# EAGLE board DP_eDP_Adapter _v1.1 (EAGLE 6.4)
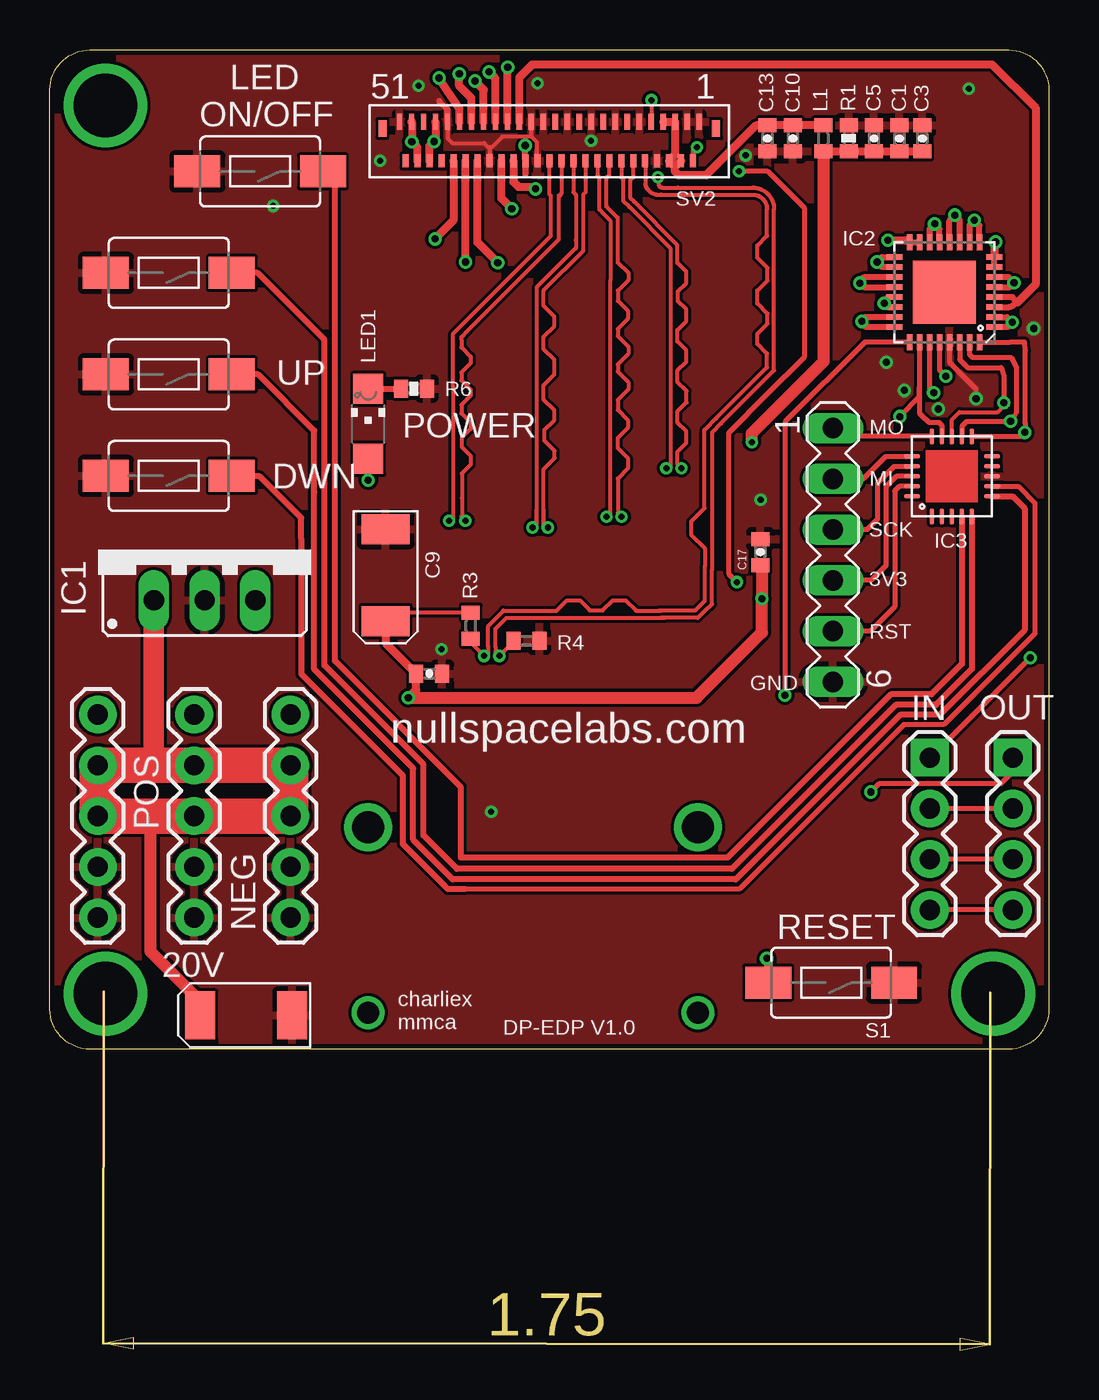
[diagram p0: board, top side]
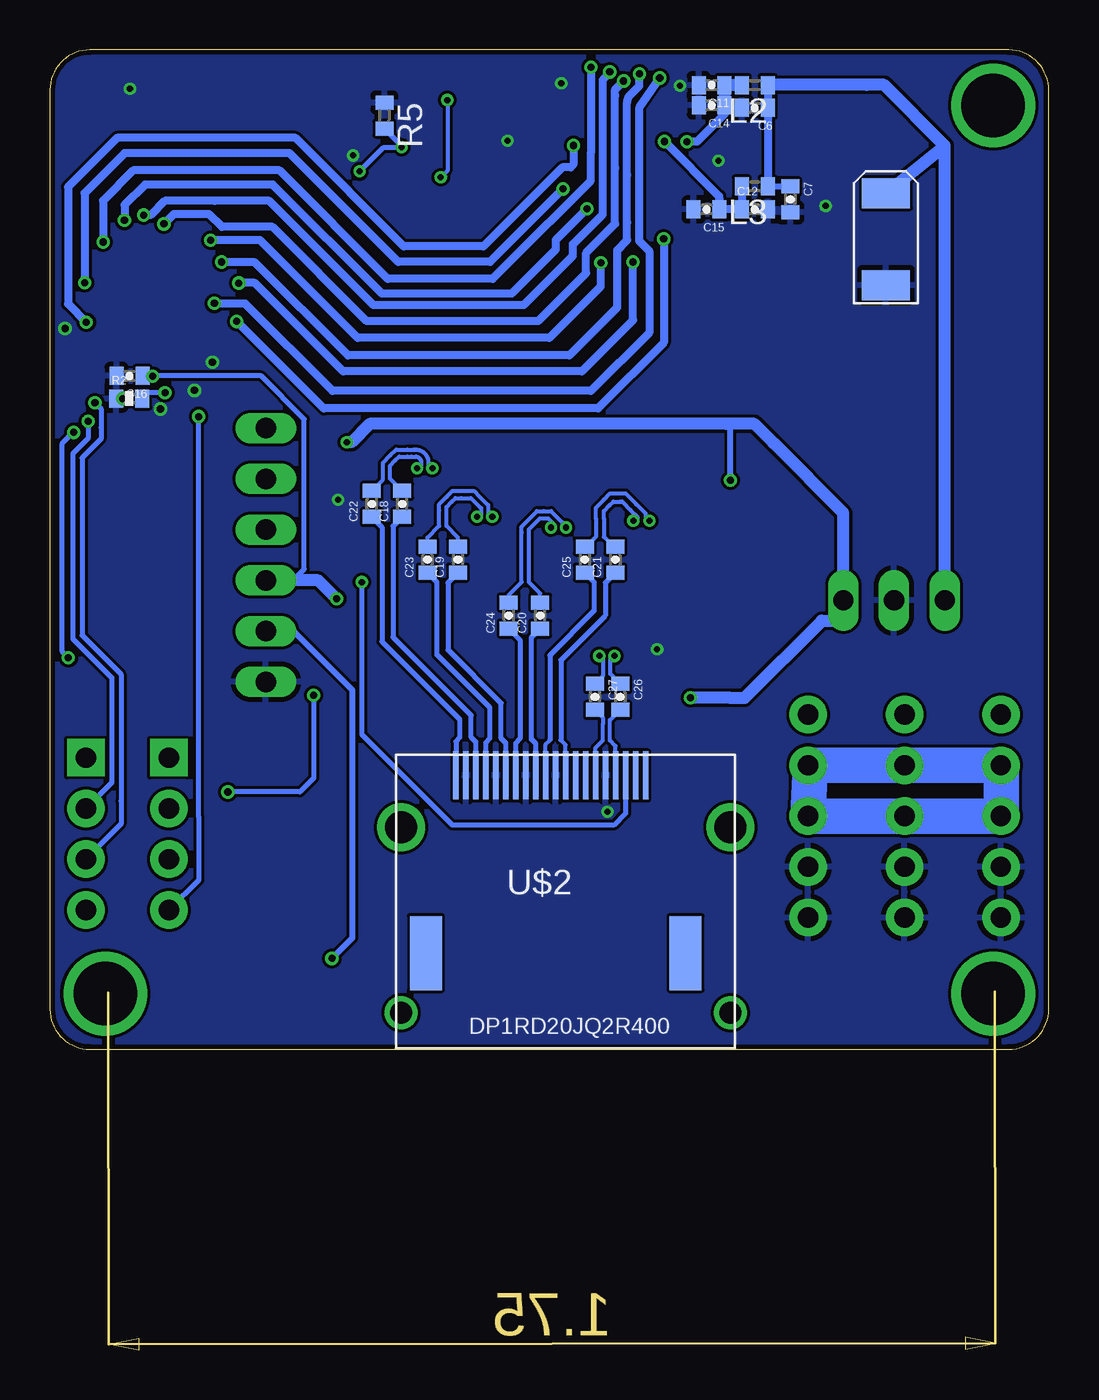
[diagram p1: board, bottom side, seen from below]

Size 50 x 50 mm. Coordinates in mm from the lower left corner, seen from the top.
Outline: 50,48 50,2 arc-90 48,0 2,0 arc-90 0,2 0,48 arc-90 2,50 48,50 arc-90 50,48
Copper layers (1*16): Top 0.035mm / dielectric 1.5mm / Bottom 0.035mm
Design rules "ITEADstudio_DRC": minimum track width 6mil, minimum drill 12mil, track to track 6mil, track to pad 6mil, pad to pad 6mil, via to via 6mil, smd to smd 0mil, copper to edge 10mil, drill to drill 10mil, minimum pad ring 10mil, minimum via ring 6mil, stop-mask expansion 2mil, vias tented up to drill 100mil, thermal gap 10mil
Net classes: 0 default: width 0.203 mm; 1 DP: width 0.203 mm, drill 0.305 mm, clearance 0.203 mm; 2 Power: width 0.305 mm

## Footprints (pad centres in the part's own frame; a part is rotated, then mirrored left to right if it is on the bottom)
0402-CAP = smd 0.7 x 0.9: 1 -0.65,0; 2 0.65,0
EIA6032 = smd 1.5 x 2.4: P$1 -2.3,0; P$2 2.3,0
SPARKFUN-PASSIVES_0402-CAP = smd 0.7 x 0.9: 1 -0.65,0; 2 0.65,0
78XXS = drill 1.016 long: GND 0,-2.54; IN -2.54,-2.54; OUT 2.54,-2.54
QFN32_XLP = smd 0.285 x 0.8: 1 -1.75,-2.5; 2 -1.25,-2.5; 3 -0.75,-2.5; 4 -0.25,-2.5; 5 0.25,-2.5; 6 0.75,-2.5; 7 1.25,-2.5; 8 1.75,-2.5; 17 1.75,2.5; 18 1.25,2.5; 19 0.75,2.5; 20 0.25,2.5; 21 -0.25,2.5; 22 -0.75,2.5; 23 -1.25,2.5; 24 -1.75,2.5 | smd 0.8 x 0.285: 9 2.5,-1.75; 10 2.5,-1.25; 11 2.5,-0.75; 12 2.5,-0.25; 13 2.5,0.25; 14 2.5,0.75; 15 2.5,1.25; 16 2.5,1.75; 25 -2.5,1.75; 26 -2.5,1.25; 27 -2.5,0.75; 28 -2.5,0.25; 29 -2.5,-0.25; 30 -2.5,-0.75; 31 -2.5,-1.25; 32 -2.5,-1.75 | smd 3.15 x 3.15: EP 0,0
MLF20 = smd 0.8 x 0.23: P$1 -2,1; P$2 -2,0.5; P$3 -2,0; P$4 -2,-0.5; P$5 -2,-1; P$11 2,-1; P$12 2,-0.5; P$13 2,0; P$14 2,0.5; P$15 2,1 | smd 0.23 x 0.8: P$6 -1,-2; P$7 -0.5,-2; P$8 0,-2; P$9 0.5,-2; P$10 1,-2; P$16 1,2; P$17 0.5,2; P$18 0,2; P$19 -0.5,2; P$20 -1,2
1X05 = drill 1.016 pad 1.88: 1 0,0; 2 2.54,0; 3 5.08,0; 4 7.62,0; 5 10.16,0
R0402 = smd 0.7 x 0.9: 1 -0.65,0; 2 0.65,0
LED_CHIPLED_1206 = smd 1.5 x 1.5: A 0,-1.75; C 0,1.75
0402-RES = smd 0.7 x 0.9: 1 -0.65,0; 2 0.65,0
TACTILE-SWITCH-1101NE = smd 2.3 x 1.6: P$1 -3.15,0; P$2 3.15,0
1X04 = drill 1.016 pad 1.88 square: 1 0,0 | drill 1.016 pad 1.88: 2 2.54,0; 3 5.08,0; 4 7.62,0
MA06-1 = drill 1.016 long: 1 -6.35,0; 2 -3.81,0; 3 -1.27,0; 4 1.27,0; 5 3.81,0; 6 6.35,0
EDP_MOLEX = smd 0.26 x 0.8: P$1 -7.5,-1.08; P$3 -6.9,-1.08; P$5 -6.3,-1.08; P$7 -5.7,-1.08; P$9 -5.1,-1.08; P$11 -4.5,-1.08; P$13 -3.9,-1.08; P$15 -3.3,-1.08; P$17 -2.7,-1.08; P$19 -2.1,-1.08; P$21 -1.5,-1.08; P$23 -0.9,-1.08; P$25 -0.3,-1.08; P$27 0.3,-1.08; P$29 0.9,-1.08; P$31 1.5,-1.08; P$33 2.1,-1.08; P$35 2.7,-1.08; P$37 3.3,-1.08; P$39 3.9,-1.08; P$41 4.5,-1.08; P$43 5.1,-1.08; P$45 5.7,-1.08; P$47 6.3,-1.08; P$49 6.9,-1.08; P$51 7.5,-1.08 | smd 0.3 x 0.65: P$2 -7.2,0.87; P$4 -6.6,0.87; P$6 -6,0.87; P$8 -5.4,0.87; P$10 -4.8,0.87; P$12 -4.2,0.87; P$14 -3.6,0.87; P$16 -3,0.87; P$18 -2.4,0.87; P$20 -1.8,0.87; P$22 -1.2,0.87; P$24 -0.6,0.87; P$26 0,0.87; P$28 0.6,0.87; P$30 1.2,0.87; P$32 1.8,0.87; P$34 2.4,0.87; P$36 3,0.87; P$38 3.6,0.87; P$40 4.2,0.87; P$42 4.8,0.87; P$44 5.4,0.87; P$46 6,0.87; P$48 6.6,0.87; P$50 7.2,0.87 | smd 0.4 x 0.85: P$52 8.35,-0.75; P$53 -8.35,-0.75
DP_REVERSE_JAE = smd 0.28 x 2.4: P$1 -5.5,0; P$2 -5,0; P$3 -4.5,0; P$4 -4,0; P$5 -3.5,0; P$6 -3,0; P$7 -2.5,0; P$8 -2,0; P$9 -1.5,0; P$10 -1,0; P$11 -0.5,0; P$12 0,0; P$13 0.5,0; P$14 1,0; P$15 1.5,0; P$16 2,0; P$17 2.5,0; P$18 3,0; P$19 3.5,0; P$20 4,0 | drill 1.6: P$22 8.25,-2.6; P$23 -8.25,-2.6 | smd 1.6 x 3.7: P$24 -7,-8.89; P$25 6,-8.89 | drill 1.1: P$26 -8.25,-11.88; P$27 8.25,-11.88

## Placement (x,y rotation side)
C1  .1uf  [0402-CAP]  42.53,45.57 90 top
C2  10uF 50V  [EIA6032]  9.82,1.69 0 top
C3  0.1uF  [0402-CAP]  43.67,45.57 90 top
C4  100uF 50V  [EIA6032]  8.15,40.53 270 bottom
C5  82pF  [0402-CAP]  41.26,45.57 90 top
C6  820pF 50V  [0402-CAP]  14.71,47.1 180 bottom
C7  820pF 50V  [0402-CAP]  12.94,42.53 270 bottom
C8  10uF  [EIA6032]  16.81,23.72 90 top
C9  .1uf  [0402-CAP]  18.99,18.79 0 top
C10  82pF  [0402-CAP]  37.19,45.57 270 top
C11  100pF 50V  [0402-CAP]  16.87,48.24 180 bottom
C12  100pF 50V  [0402-CAP]  14.71,42.02 0 bottom
C13  1000pF  [0402-CAP]  35.92,45.57 270 top
C14  820pF 50V  [0402-CAP]  16.87,47.23 180 bottom
C15  820pF 50V  [0402-CAP]  17.13,42.02 180 bottom
C16  0.1uF  [0402-CAP]  46.02,33.69 180 bottom
C17  0.1uF  [0402-CAP]  35.57,24.87 90 top
C18  [SPARKFUN-PASSIVES_0402-CAP]  32.37,27.29 90 bottom
C19  [SPARKFUN-PASSIVES_0402-CAP]  29.57,24.49 90 bottom
C20  [SPARKFUN-PASSIVES_0402-CAP]  25.46,21.7 90 bottom
C21  [SPARKFUN-PASSIVES_0402-CAP]  21.7,24.49 90 bottom
C22  [SPARKFUN-PASSIVES_0402-CAP]  33.89,27.29 90 bottom
C23  [SPARKFUN-PASSIVES_0402-CAP]  31.1,24.49 90 bottom
C24  [SPARKFUN-PASSIVES_0402-CAP]  27.03,21.7 90 bottom
C25  [SPARKFUN-PASSIVES_0402-CAP]  23.22,24.49 90 bottom
C26  [SPARKFUN-PASSIVES_0402-CAP]  21.44,17.63 270 bottom
C27  [SPARKFUN-PASSIVES_0402-CAP]  22.71,17.63 270 bottom
IC1  [78XXS]  7.74,25 0 top
IC2  TLC5947XLP  [QFN32_XLP]  44.78,37.89 90 top
IC3  tiny2313  [MLF20]  45.15,28.66 90 top
JP1  [1X05]  2.39,16.74 270 top
JP2  [1X05]  7.22,16.74 270 top
JP3  [1X05]  12.05,16.74 270 top
L1  240ohm-300ma  [R0402]  38.72,45.57 90 top
L2  240ohm-300ma  [R0402]  14.71,48.24 180 bottom
L3  240ohm-300ma  [R0402]  14.71,43.17 180 bottom
LED1  [LED_CHIPLED_1206]  15.93,31.29 0 top
R1  [0402-RES]  39.99,45.57 270 top
R2  [0402-RES]  46.02,32.56 0 bottom
R3  100K  [R0402]  21.06,21.19 90 top
R4  100K  [R0402]  23.86,20.43 180 top
R5  100K  [R0402]  33.26,46.72 270 bottom
R6  [0402-RES]  18.22,33.05 180 top
S1  SWITCH-MOMENTARY-2-SMD-1101NE  [TACTILE-SWITCH-1101NE]  39.11,3.33 180 top
S2  SWITCH-MOMENTARY-2-SMD-1101NE  [TACTILE-SWITCH-1101NE]  5.95,28.68 180 top
S3  SWITCH-MOMENTARY-2-SMD-1101NE  [TACTILE-SWITCH-1101NE]  5.95,33.76 180 top
S4  SWITCH-MOMENTARY-2-SMD-1101NE  [TACTILE-SWITCH-1101NE]  5.95,38.84 180 top
S5  SWITCH-MOMENTARY-2-SMD-1101NE  [TACTILE-SWITCH-1101NE]  10.52,43.92 180 top
SIG_IN  [1X04]  44.05,14.59 270 top
SIG_OUT  [1X04]  48.2,14.59 270 top
SV1  [MA06-1]  39.2,24.73 270 top
SV2  EDP_CONNECTOR  [EDP_MOLEX]  25,45.32 180 top
U$2  DP1RD20JQ2R400  [DP_REVERSE_JAE]  24.18,13.7 0 bottom

## Library data of the parts
C1-C15 R1 R2 R6 = SparkFun-Passives
C16 C17 = SparkFun
C18-C27 SV2 U$2 = DP_eDP_Adapter
IC1 = v-reg
IC2 = slice_noshift
IC3 = NSL_Cylon
JP1-JP3 SIG_IN SIG_OUT = SparkFun-Connectors
L1-L3 R3-R5 = rcl
LED1 = badge.lbrbadge_2013
S1-S5 = SparkFun-Electromechanical
SV1 = NSL

## Nets
20V [Power]: C2.P$1 C4.P$1 C6.1 C7.1 IC1.IN JP1.2 JP1.3 JP2.2 JP2.3 JP3.2 JP3.3 L2.1 L3.1
+3V3: C1.1 C3.1 C5.1 C8.P$1 C9.1 C16.1 C17.1 IC1.OUT IC2.28 IC3.P$18 L1.1 LED1.A R1.2 R3.2 SV1.4
AUX_CH_N: C26.1 R3.1 SV2.P$10
AUX_CH_P: C27.1 R4.2 SV2.P$9
AUX_N: C26.2 U$2.P$17
AUX_P: C27.2 U$2.P$15
BLANK: IC2.30 IC3.P$13 SIG_IN.3 SIG_OUT.3
BUTTON_1: IC3.P$7 S2.P$1
BUTTON_2: IC3.P$6 S3.P$1
BUTTON_3: IC3.P$5 S4.P$1
BUTTON_4: IC3.P$4 S5.P$1
GND: C1.2 C2.P$2 C3.2 C4.P$2 C5.2 C6.2 C7.2 C8.P$2 C9.2 C10.2 C11.2 C12.2 C13.2 C14.2 C15.2 C16.2 C17.2 IC1.GND IC2.29 IC3.P$8 JP1.4 JP1.5 JP2.4 JP2.5 JP3.4 JP3.5 R1.1 R2.1 R4.1 R5.1 R6.1 S1.P$1 S2.P$2 S3.P$2 S4.P$2 S5.P$2 SV1.6 SV2.P$1 SV2.P$3 SV2.P$8 SV2.P$11 SV2.P$15 SV2.P$19 SV2.P$23 SV2.P$27 SV2.P$28 SV2.P$29 SV2.P$36 SV2.P$43 SV2.P$51 U$2.P$2 U$2.P$5 U$2.P$8 U$2.P$11 U$2.P$16
HPD: R5.2 SV2.P$2 U$2.P$18
LANE0_N: C18.2 SV2.P$12
LANE0_P: C22.2 SV2.P$14
LANE1_N: C19.2 SV2.P$16
LANE1_P: C23.2 SV2.P$18
LANE2_N: C20.2 SV2.P$20
LANE2_P: C24.2 SV2.P$22
LANE3_N [DP]: C21.2 SV2.P$24
LANE3_P [DP]: C25.2 SV2.P$26
LED_NEG_1A: IC2.23 IC2.24 SV2.P$42
LED_NEG_1B: IC2.11 IC2.12 SV2.P$35
LED_NEG_2A: IC2.21 IC2.22 SV2.P$41
LED_NEG_2B: IC2.9 IC2.10 SV2.P$34
LED_NEG_3A: IC2.19 IC2.20 SV2.P$40
LED_NEG_3B: IC2.7 IC2.8 SV2.P$33
LED_NEG_4A: IC2.17 IC2.18 SV2.P$39
LED_NEG_4B: IC2.5 IC2.6 SV2.P$32
LED_NEG_5A: IC2.15 IC2.16 SV2.P$38
LED_NEG_5B: IC2.3 IC2.4 SV2.P$31
LED_NEG_6A: IC2.13 IC2.14 SV2.P$37
LED_NEG_6B: IC2.1 IC2.2 SV2.P$30
LED_POS_1: C11.1 C14.1 L2.2 SV2.P$48 SV2.P$49
LED_POS_2: C12.1 C15.1 L3.2 SV2.P$45 SV2.P$46
MISO: IC3.P$16 SV1.2
MOSI: IC3.P$15 SV1.1
N$3: LED1.C R6.2
N$3_N [DP]: C18.1 U$2.P$3
N$3_P [DP]: C22.1 U$2.P$1
N$5: IC3.P$10
N$13: IC2.27 R2.2
N$15_N [DP]: C19.1 U$2.P$6
N$15_P [DP]: C23.1 U$2.P$4
N$17_N [DP]: C20.1 U$2.P$9
N$17_P [DP]: C24.1 U$2.P$7
N$19_N [DP]: C21.1 U$2.P$12
N$19_P [DP]: C25.1 U$2.P$10
RST: IC3.P$19 S1.P$2 SV1.5
SCK: IC3.P$17 SV1.3
SCLK: IC2.31 IC3.P$12 SIG_IN.2 SIG_OUT.2
SIN: IC2.32 IC3.P$11 SIG_IN.1
SOUT: IC2.25 SIG_OUT.1
VIN: C10.1 C13.1 L1.2 SV2.P$4 SV2.P$5 SV2.P$6 SV2.P$7
XLAT: IC2.26 IC3.P$14 SIG_IN.4 SIG_OUT.4

## Tracks (layer width: path | path; a pad name or v marks a point on that pad's centre or on a via)
20V
  Top 0.203: 2.37,11.69 JP1.3
  Top 0.61: 5.2,14.22 5.12,14.22 4.43,14.22 4.43,14.21 7.8,14.21 | 5.04,11.66 5.04,4.89 7.52,2.4 C2.P$1
  Top 1.016: IC1.IN 5.2,14.29 5.12,14.22
  Top 1.778: JP1.2 JP2.2 7.8,14.21 JP3.2 JP3.3 JP2.3 5.04,11.66 JP1.3 | 2.37,14.18 2.37,11.69
  Bottom 0.305: L3.1 C7.1
  Bottom 0.406: L2.1 C6.1 L3.1
  Bottom 0.61: 14.05,48.26 L2.1 14.06,48.25 9.12,48.25 8.24,48.25 5.2,45.22 | IC1.IN 5.2,45.22 | 5.2,45.22 C4.P$1
  Bottom 1.778: 2.36,14.22 11.93,14.22 11.93,14.18 11.92,14.18 JP3.3 JP1.3 2.38,14.14
+3V3  (via drill 0.3, 0.36)
  Top 0.203: R3.2 17.23,21.84 C8.P$1
  Top 0.254: IC2.28 44.53,33.99 v44.85,33.67 | IC3.P$18 43.14,28.66 42.37,28.66 41.85,28.14 41.85,24.2 41.11,23.46 SV1.4
  Top 0.305: 23.25,17.54 23.3,17.58 | LED1.A v15.93,28.47
  Top 0.406: L1.1 R1.2 C5.1 C1.1 C3.1 | C8.P$1 16.81,20.32 C9.1 18.34,17.98 18.14,17.78 v17.94,17.58
  Top 0.61: v17.94,17.58 23.3,17.58 32.37,17.58 35.64,20.86 v35.64,22.54 35.64,24.15 C17.1 | v35.13,30.37 35.13,30.82 38.42,34.11 | 38.42,34.11 38.73,34.41 | L1.1 38.73,34.41 | 38.73,34.41 38.42,34.11
  Bottom 0.254: C16.1 45.35,33.67 v44.85,33.67 44.84,33.69 39.43,33.69 37.27,31.53 37.27,24.02 37.76,23.53 SV1.4
  Bottom 0.305: v15.93,28.47 15.93,31.07 16.15,31.29
  Bottom 0.61: v35.64,22.54 36.56,23.46 SV1.4 | v17.94,17.58 15.95,17.58 15.22,17.58 11.36,21.44 10.31,21.44 IC1.OUT 10.28,26.83 13.79,30.33 14.74,31.29 16.15,31.29 33.99,31.29 34.91,30.37 v35.13,30.37
AUX_CH_N  (via drill 0.3)
  Top 0.203: 21.94,19.68 v21.74,19.68 | SV2.P$10 29.8,43.3 arc90 30.64,42.75 31.29,42.75 35.19,42.75 arc-90 35.9,42.04 35.9,40.7 35.41,40.22 35.41,39.61 35.92,39.1 35.92,38.46 35.41,37.95 35.41,37.32 35.92,36.81 35.92,36.3 35.41,35.8 35.41,35.29 35.9,34.8 35.9,34.12 33.34,31.57 32.78,31 32.77,30.99 32.77,27.07 32.1,26.4 32.1,25.75 32.78,25.06 32.78,24.16 32.78,22.43 32.49,22.14 32.29,21.94 30.56,21.94 | R3.1 21.06,20.35 v21.74,19.68 | v21.74,19.68 arc90 21.94,19.88 21.94,20.15 21.94,21.18 22.33,21.57 22.7,21.94 25.37,21.94 25.89,22.46 26.52,22.46 27.03,21.95 27.67,21.95 28.18,22.46 28.82,22.46 29.33,21.95 29.34,21.94 30.51,21.94 | 30.51,21.94 30.56,21.94 | 30.56,21.94 30.6,21.94 | 30.56,21.94 30.51,21.94
  Bottom 0.203: C26.1 21.94,18.78 21.94,19.68 v21.74,19.68
AUX_CH_P  (via drill 0.3)
  Top 0.203: 22.3,19.68 v22.5,19.68 | v30.44,43.63 arc-90 30.49,43.49 30.49,43.26 arc90 30.64,43.11 31.44,43.11 35.19,43.11 arc-90 36.25,42.04 36.25,33.97 33.6,31.31 33.14,30.86 33.14,24.01 33.14,22.29 arc-90 33.13,22.27 32.75,21.89 32.44,21.58 30.56,21.58 | v30.11,47.49 SV2.P$9 | R4.2 23.33,20.52 v22.5,19.68 | v22.5,19.68 arc-90 22.3,19.88 22.3,20.15 22.3,21.03 22.59,21.32 22.85,21.58 30.51,21.58 | 30.51,21.58 30.56,21.58 | 30.56,21.58 30.75,21.58 | 30.51,21.58 30.56,21.58
  Bottom 0.203: C27.1 22.3,18.7 22.3,19.68 v22.5,19.68 | v30.11,47.49 30.11,43.96 v30.44,43.63
AUX_N
  Bottom 0.203: U$2.P$17 21.68,15.16 21.96,15.45 21.96,16.26 21.96,16.46 C26.2
AUX_P
  Bottom 0.203: U$2.P$15 22.68,15.09 22.32,15.45 22.32,16.26 22.32,16.59 C27.2
BLANK  (via drill 0.36)
  Top 0.203: IC3.P$13 45.15,31.5 45.54,31.88 47.44,31.88 47.75,32.19 v47.75,32.34
  Top 0.254: IC2.30 45.55,35.37 45.55,34.5 45.94,34.11 47.62,34.11 47.76,33.7 47.76,32.35 v47.75,32.34 | SIG_OUT.3 SIG_IN.3
  Bottom 0.254: v47.75,32.34 47.44,32.04 47.44,31.11 47.44,30.54 48.39,29.59 48.39,20.71 46.44,18.75 46.44,12.43 46.44,11.27 SIG_OUT.3
BUTTON_1
  Top 0.254: IC3.P$7 48.47,28.16 49.31,27.32 49.31,20.8 44.75,16.24 42.74,16.24 34.51,8.01 20.76,8.01
  Top 0.305: 20.76,8.01 19.92,8.01 17.67,10.26 17.67,13.68 13.18,18.17 12.58,18.78 12.58,25.53 12.58,26.59 10.51,28.66 9.12,28.66 S2.P$1
BUTTON_2
  Top 0.305: IC3.P$6 48.19,27.66 48.8,27.06 48.8,20.97 44.56,16.73 42.56,16.73 34.34,8.5 20.16,8.5 18.18,10.48 18.18,14.05 13.23,19.01 13.23,27.87 13.23,30.96 10.42,33.76 S3.P$1
BUTTON_3
  Top 0.305: IC3.P$5 46.15,19.02 44.36,17.23 42.34,17.23 34.13,9.02 20.38,9.02 18.7,10.7 18.7,14.26 13.75,19.21 13.75,27.68 13.75,35.49 10.39,38.84 S4.P$1
BUTTON_4
  Top 0.305: IC3.P$4 45.65,19.27 44.13,17.75 42.09,17.75 33.93,9.58 20.58,9.58 20.58,13.11 14.27,19.43 14.27,27.45 14.27,43.33 S5.P$1
GND  (via drill 0.3, 0.36)
  Top 0.203: SV2.P$43 19.91,45.57 20.15,45.33 21.74,45.33 21.93,45.14 | 21.93,45.14 22,45.07 SV2.P$36 | SV2.P$28 24.38,44.47 24.38,45.38 24.1,45.66 | 24.1,45.66 SV2.P$29 | 24.1,45.66 22.65,45.66 22.12,45.14 21.93,45.14
  Top 0.254: IC2.29 45.03,34.38 45.16,34.26 46.36,33.05 v46.36,32.56
  Top 0.305: SV2.P$43 19.9,47.03 19.49,47.44
  other vias: 44.47,32.04 42.77,32.96 41.87,34.37 49.24,36.06 11.17,42.2 45.99,48.06 22.09,11.88 19.6,20.01 34.83,44.72 35.58,27.49 16.53,44.46 27.1,45.46 18.46,48.22 24.4,48.33
  pour Top: -0.91,50.91 51.42,50.91 51.42,-0.91 -0.91,-0.91
  pour Bottom: 53.19,53.45 53.19,-1.92 -1.42,-1.92 -1.42,53.45
HPD  (via drill 0.3)
  Top 0.254: v34.38,23.37 33.99,23.77 33.99,30.86 35.9,32.76 37.79,34.65 37.79,42.07 35.94,43.92 v34.5,43.92 34.78,43.92 | v32.39,45.13 32.2,44.94 SV2.P$2
  Bottom 0.254: U$2.P$18 21.18,11.8 21.77,11.21 29.85,11.21 34.38,15.74 v34.38,23.37 | v34.5,43.92 33.29,45.13 v32.39,45.13 32.39,45.2 R5.2
LANE0_N  (via drill 0.3)
  Top 0.203: 31.41,29.06 v31.62,29.06 arc-90 31.43,29.25 31.43,29.9 31.86,30.33 31.86,30.92 31.43,31.35 31.43,31.92 31.87,32.37 31.87,32.94 31.43,33.38 31.43,33.97 31.86,34.4 31.86,34.97 31.41,35.41 31.41,35.99 31.86,36.43 31.86,37.01 31.43,37.45 31.43,37.9 31.86,38.34 31.86,38.91 31.41,39.35 31.41,40.24 29.25,42.4 29.06,42.59 29.06,43.5 29.2,43.64 SV2.P$12
  Bottom 0.203: C18.2 32.98,28.55 32.98,28.73 32.98,29.01 32.98,29.19 32.71,29.46 32.52,29.65 32.1,29.65 31.92,29.65 31.69,29.65 arc90 31.41,29.37 31.41,29.27 arc90 v31.62,29.06
LANE0_P  (via drill 0.3)
  Top 0.203: v30.86,29.06 31.06,29.06 31.06,40.09 29,42.15 28.71,42.44 28.71,43.5 28.6,43.61 SV2.P$14
  Bottom 0.203: C22.2 33.33,28.5 33.33,28.73 33.33,29.01 33.33,29.34 32.96,29.71 32.67,30 32.1,30 31.77,30 31.69,30 arc90 31.06,29.37 31.06,29.27 arc-90 v30.86,29.06
LANE1_N  (via drill 0.3)
  Top 0.203: 28.42,26.64 v28.62,26.64 | SV2.P$16 28,43.76 27.86,43.62 27.86,42.17 28.01,42.02 28.42,41.61 28.42,40.11 28.42,40 28.42,39.38 28.95,38.84 28.95,38.48 28.43,37.95 28.43,37.45 28.94,36.94 28.94,36.56 28.43,36.05 28.43,35.68 28.95,35.16 28.95,34.79 28.43,34.27 28.43,33.9 28.95,33.38 28.95,33.01 28.43,32.49 28.43,31.98 28.94,31.48 28.94,31.1 28.43,30.59 28.43,30.08 28.94,29.57 28.94,29.06 28.43,28.56 28.43,26.83 v28.62,26.64 | 28.42,26.84 v28.62,26.64
  Bottom 0.203: C19.2 29.57,25.6 30.16,26.18 30.16,26.96 30.16,27.12 29.89,27.39 29.7,27.58 29.41,27.58 28.92,27.58 28.75,27.4 28.42,27.07 28.42,26.64 v28.62,26.64
LANE1_P  (via drill 0.3)
  Top 0.203: 28.06,26.64 v27.86,26.64 28.05,26.83 28.05,27.49 | SV2.P$18 27.4,43.72 27.5,43.62 27.5,42.02 27.76,41.77 28.06,41.46 28.06,38.48 28.06,27.5 28.05,27.49 | 28.05,28.05 28.05,27.49
  Bottom 0.203: C23.2 31.1,25.6 30.51,26.18 30.51,26.96 30.51,27.27 30.14,27.64 29.85,27.93 29.41,27.93 28.77,27.93 28.49,27.65 28.06,27.22 28.06,26.64 v27.86,26.64
LANE2_N  (via drill 0.3)
  Top 0.203: 24.72,26.98 24.72,26.11 v24.92,26.11 24.72,26.31 24.72,26.98 | SV2.P$20 26.8,42.87 26.69,42.75 26.69,40.48 26.69,39.94 24.72,37.97 24.72,37.19 25.25,36.66 25.25,36.18 24.72,35.64 24.72,35.03 25.25,34.5 25.25,33.76 24.72,33.23 24.72,32.51 25.25,31.97 25.25,31.48 24.75,30.97 24.75,30.46 25.27,29.94 25.27,29.57 24.72,29.03 24.72,26.98
  Bottom 0.203: C20.2 25.46,22.8 26.03,23.37 26.03,25.86 26.03,26.01 25.7,26.34 25.47,26.56 25.27,26.56 25.06,26.56 24.88,26.39 24.72,26.22 24.72,26.11 v24.92,26.11
LANE2_P  (via drill 0.3)
  Top 0.203: 24.36,26.98 24.36,26.11 v24.16,26.11 24.36,26.31 24.36,26.98 | 24.36,26.98 24.36,38.12 26.32,40.07 26.33,40.09 26.33,40.48 26.33,42.75 26.2,42.89 SV2.P$22
  Bottom 0.203: C24.2 27.03,22.73 26.38,23.37 26.38,25.86 26.38,26.15 25.95,26.59 25.62,26.92 25.27,26.92 24.91,26.92 24.63,26.64 24.36,26.37 24.36,26.11 v24.16,26.11
LANE3_N  (via drill 0.3)
  Top 0.203: SV2.P$24 25.6,42.83 arc-90 25.48,42.72 25.48,40.52 20.93,35.97 20.59,35.63 20.59,35.53 20.59,35.12 21.06,34.65 21.06,34.34 20.59,33.87 20.59,33.47 21.06,33 21.06,32.71 20.59,32.24 20.59,31.82 21.06,31.35 21.06,31.05 20.61,30.59 20.61,30.14 21.06,29.69 21.06,29.25 20.62,28.81 20.62,27.58 20.62,26.63 v20.8,26.45 | 20.62,26.45 v20.8,26.45 | 20.68,26.56 v20.8,26.45 | 20.59,26.65 v20.8,26.45
  Bottom 0.203: C21.2 21.78,25.14 22.27,25.64 22.27,26.56 22.27,26.92 21.99,27.21 21.79,27.4 21.46,27.4 21.35,27.4 20.93,26.98 20.59,26.64 20.59,26.45 v20.8,26.45
LANE3_P  (via drill 0.3)
  Top 0.203: v19.98,26.45 20.19,26.45 20.19,32.56 20.19,33.11 20.19,35.8 20.64,36.26 25.08,40.69 25.08,42.72 25,42.79 SV2.P$26
  Bottom 0.203: C25.2 23.17,25.14 22.68,25.64 22.68,26.56 22.68,27.09 22.27,27.49 21.96,27.81 21.46,27.81 21.18,27.81 20.64,27.27 20.19,26.81 20.19,26.45 v19.98,26.45
LED_NEG_1A  (via drill 0.36)
  Top 0.254: SV2.P$42 20.23,44.45
  Top 0.305: IC2.23 40.86,36.63 arc90 v40.65,36.42 arc90 40.93,36.13 IC2.24
  Top 0.406: SV2.P$42 20.2,41.47 v19.27,40.55
  Bottom 0.406: v40.65,36.42 36.29,32.06 22.56,32.06 19.27,35.35 v19.27,40.55
LED_NEG_1B  (via drill 0.36)
  Top 0.305: IC2.11 45.53,41.51 v45.31,41.74 45.03,41.47 IC2.12
  Top 0.406: SV2.P$35 22.3,48.58 v21.98,48.9
  Bottom 0.406: v45.31,41.74 44.96,41.74 44.25,42.45 41.75,42.45 39.02,42.45 33.8,37.23 26.28,37.23 25.72,37.79 23.82,39.69 23.82,40.28 22.32,41.78 22.32,44.36 22.32,48.51 21.98,48.85 v21.98,48.9
LED_NEG_2A  (via drill 0.36)
  Top 0.305: IC2.22 41.95,37.13 v41.76,37.32 arc-90 42.08,37.63 IC2.21
  Top 0.406: SV2.P$41 20.5,47.05 v19.48,48.6
  Bottom 0.406: v41.76,37.32 41.75,37.31 40.23,37.31 35.86,32.94 22.92,32.94 20,35.86 20,39.94 20.5,40.44 20.5,43.41 20.5,47.1 v19.48,48.6
LED_NEG_2B  (via drill 0.36)
  Top 0.305: IC2.10 46.03,41.23 v46.27,41.47 46.53,41.21 IC2.9
  Top 0.406: v23.12,42.06 22.6,42.58 SV2.P$34
  Bottom 0.406: v46.27,41.47 46.26,41.48 46.26,42.25 45.24,43.26 38.84,43.26 33.38,37.8 26.89,37.8 26.33,38.36 24.67,40.02 24.67,40.49 23.12,42.04 v23.12,42.06
LED_NEG_3A  (via drill 0.36)
  Top 0.305: IC2.20 40.74,38.13 v40.55,38.34 arc-90 40.84,38.63 IC2.19
  Top 0.406: v20.81,39.39 v20.8,39.4 SV2.P$40
  Bottom 0.406: v40.55,38.34 v40.53,38.35 39.74,38.35 35.31,33.91 23.37,33.91 20.81,36.48 v20.81,39.39
LED_NEG_3B  (via drill 0.36)
  Top 0.305: IC2.7 IC2.8
  Top 0.406: SV2.P$33 22.9,49.11 v22.92,49.13 | v47.34,40.39 47.28,40.34 IC2.8
  Bottom 0.406: v22.92,49.13 22.92,44.85 22.92,43.47 27.08,39.3 27.83,38.55 33.09,38.55 38.51,43.97 45.83,43.97 47.34,42.46 v47.34,40.39
LED_NEG_4A  (via drill 0.36)
  Top 0.305: IC2.17 41.65,39.63 v41.41,39.39 41.66,39.13 IC2.18
  Top 0.406: SV2.P$39 21.1,47.59 20.49,48.2 v20.49,48.8
  Bottom 0.406: v41.41,39.39 41.4,39.38 39.74,39.38 35.08,34.72 24,34.72 23.37,35.34 21.6,37.12 21.6,39.99 21.1,40.48 21.1,41.37 21.1,43.75 21.1,47.39 arc43 20.97,47.73 20.49,48.2 v20.49,48.8
LED_NEG_4B  (via drill 0.36)
  Top 0.305: IC2.6 47.98,38.63 v48.27,38.35 48.05,38.13 IC2.5
  Top 0.406: SV2.P$32 23.2,43.4 23.45,43.15 24.21,43.15 v24.31,43.05
  Bottom 0.406: v24.31,43.05 27.96,39.4 32.57,39.4 38.01,44.84 46.26,44.84 48.27,42.83 v48.27,38.35
LED_NEG_5A  (via drill 0.36)
  Top 0.305: IC2.16 IC2.15
  Top 0.406: v41.95,40.48 42.94,40.48 IC2.16 | v22.42,39.35 21.4,40.37 SV2.P$38
  Bottom 0.406: 41.93,40.46 v41.95,40.48 39.48,40.48 34.59,35.59 25,35.59 24.2,36.39 22.42,38.17 v22.42,39.35
LED_NEG_5B
  Top 0.305: 48.44,37.37 48.34,37.48 | 48.34,37.48 48.18,37.63 IC2.4 | IC2.3 47.99,37.13 arc90 48.34,37.48
  Top 0.406: SV2.P$31 23.5,48.63 24.15,49.28 47.16,49.28 49.35,47.1 49.35,38.27 48.44,37.37
LED_NEG_6A  (via drill 0.36)
  Top 0.305: IC2.14 44.03,41.04 v44.29,41.29 44.53,41.05 IC2.13
  Top 0.406: SV2.P$37 21.7,47.96 21.71,47.97 21.71,48.01 v21.28,48.44
  Bottom 0.406: v44.29,41.29 43.8,41.79 42.03,41.79 41.38,41.14 38.86,41.14 34.14,36.43 25.56,36.43 25.02,36.96 23.16,38.83 23.16,39.85 21.71,41.29 21.71,44.09 21.71,47.73 21.71,48.01 v21.28,48.44
LED_NEG_6B  (via drill 0.36)
  Top 0.305: SV2.P$30 23.8,43.78 v23.79,45.22 | IC2.1 47.93,36.13 v48.18,36.38 47.92,36.63 IC2.2
  Bottom 0.406: v23.79,45.22 23.79,44.27 23.93,44.13 24.35,44.13 28.3,40.18 32.29,40.18 37.71,45.6 46.64,45.6 49.09,43.15 49.09,37.29 v48.18,36.38
LED_POS_1  (via drill 0.36)
  Top 0.406: SV2.P$49 18.12,46.38 v18.12,45.41 18.4,45.12 SV2.P$48
  Bottom 0.406: C14.1 16.22,46.8 17.61,45.41 v18.12,45.41
  Bottom 0.61: L2.2 C11.1 C14.1
LED_POS_2  (via drill 0.36)
  Top 0.406: SV2.P$46 19,45.19 v19.23,45.42 arc90 19.3,45.49 SV2.P$45
  Bottom 0.406: L3.2 C12.1 C15.1 16.48,42.54 16.5,42.56 16.5,42.69 v19.23,45.42
MISO
  Top 0.254: IC3.P$16 43.12,29.64 41.81,29.64 40.72,28.54 SV1.2
MOSI
  Top 0.254: IC3.P$15 39.61,30.66 SV1.1
N$1  (via drill 3.17)
  other vias: 47.23,2.77
N$3
  Top 0.305: LED1.C 17.55,33.04 R6.2
N$3_N
  Bottom 0.254: U$2.P$3 28.68,15.37 28.91,15.6 28.91,16.71 32.82,20.62 32.82,26.18 C18.1
N$3_P
  Bottom 0.254: U$2.P$1 29.68,15.39 29.47,15.6 29.47,16.48 33.38,20.39 33.38,26.13 C22.1
N$4  (via drill 3.17)
  other vias: 2.77,47.23
N$6  (via drill 3.17)
  other vias: 2.77,2.77
N$13  (via drill 0.36)
  Top 0.254: IC2.27 44.03,33.05 v44.24,32.85
  Bottom 0.254: v44.24,32.85 45.08,32.85 R2.2
N$15_N
  Bottom 0.254: U$2.P$6 27.18,15.32 27.41,15.55 27.41,17.32 30.08,19.98 30.08,23.33 C19.1
N$15_P
  Bottom 0.254: U$2.P$4 28.18,15.34 27.97,15.55 27.97,17.09 30.64,19.75 30.64,23.39 C23.1
N$17_N
  Bottom 0.254: U$2.P$9 25.68,15.29 25.91,15.53 25.91,20.59 C20.1
N$17_P
  Bottom 0.254: U$2.P$7 26.68,15.32 26.47,15.53 26.47,20.49 C24.1
N$19_N
  Bottom 0.203: U$2.P$12 24.18,15.23 24.42,15.46
  Bottom 0.254: 24.42,15.46 24.42,19.47 22.19,21.7 22.19,23.35 C21.1
N$19_P
  Bottom 0.203: U$2.P$10 25.18,15.26 24.98,15.46
  Bottom 0.254: 24.98,15.46 24.98,19.71 22.75,21.93 22.75,23.37 C25.1
RST  (via drill 0.36)
  Top 0.254: 40.63,20.92 SV1.5 41.07,20.92 42.3,22.14 42.3,27.93 42.53,28.16 IC3.P$19 | 35.88,3.41 S1.P$2
  Top 0.305: v35.88,4.54 35.88,3.41
  Bottom 0.254: SV1.5 37.81,20.92
  Bottom 0.305: 37.81,20.92 34.87,17.98 34.87,5.56 v35.88,4.54
SCK
  Top 0.254: IC3.P$17 43.14,29.15 42.26,29.15 41.43,28.33 41.43,26.52 40.91,26 SV1.3
SCLK  (via drill 0.36)
  Top 0.254: IC2.31 46.03,34.77 46.18,34.61 48.13,34.61 48.38,34.11 48.38,31.87 48.13,31.41 v48.09,31.41 45.89,31.41 45.68,31.2 45.68,30.69 IC3.P$12 | SIG_IN.2 SIG_OUT.2
  Bottom 0.254: v48.09,31.41 48.09,30.56 48.85,29.8 48.85,20.53 48.66,20.34 46.91,18.59 46.91,15.04 46.91,13.34 SIG_OUT.2
SIN  (via drill 0.36)
  Top 0.254: IC3.P$11 | IC2.32 48.08,35.38 48.79,35.38 48.84,34.96 48.84,31.27 48.84,30.89 v48.81,30.86 48.61,30.66 IC3.P$11 | IC3.P$11 48.6,30.66 | v49.08,19.59 44.08,14.59 SIG_IN.1
  Bottom 0.254: v49.08,19.59 49.38,19.89 49.38,30.32 48.84,30.86 v48.81,30.86
SOUT  (via drill 0.36)
  Top 0.254: IC2.25 43.02,35.38 40.79,35.38 36.8,31.39 v36.8,17.71 | v41.09,12.87 41.52,13.3 47.63,13.3 48.2,13.88 SIG_OUT.1
  Bottom 0.254: v36.8,17.71 36.8,13.56 37.48,12.87 v41.09,12.87
VIN
  Top 0.406: L1.2 C10.1 C13.1 35.35,46.22 32.85,43.72 31.48,43.72 31.3,43.9 31.3,44.15 | 31.3,44.15 SV2.P$6 31.3,44.75 SV2.P$5 SV2.P$7 | 31.3,44.15 SV2.P$4
XLAT  (via drill 0.36)
  Top 0.254: IC2.26 43.53,33.14 | IC3.P$14 44.65,31.22 44.51,31.36 44,31.36 43.82,31.54 43.81,31.54 43.53,31.82 43.53,33.14 | SIG_OUT.4 SIG_IN.4 | v42.55,31.66 43.53,32.64 43.53,33.14
  Bottom 0.254: v42.55,31.66 42.55,11.61 42.55,10.47 42.55,8.46 SIG_IN.4

## Text on the board
tPlace: LED | ON/OFF | UP | POWER | MO | DWN | MI | SCK | 3V3 | RST | GND | nullspacelabs.com | IN | OUT | POS | NEG | RESET | 20V | charliex / mmca | DP-EDP V1.0